# EAGLE board GrblMainboard - v3.1 (EAGLE 6.3)
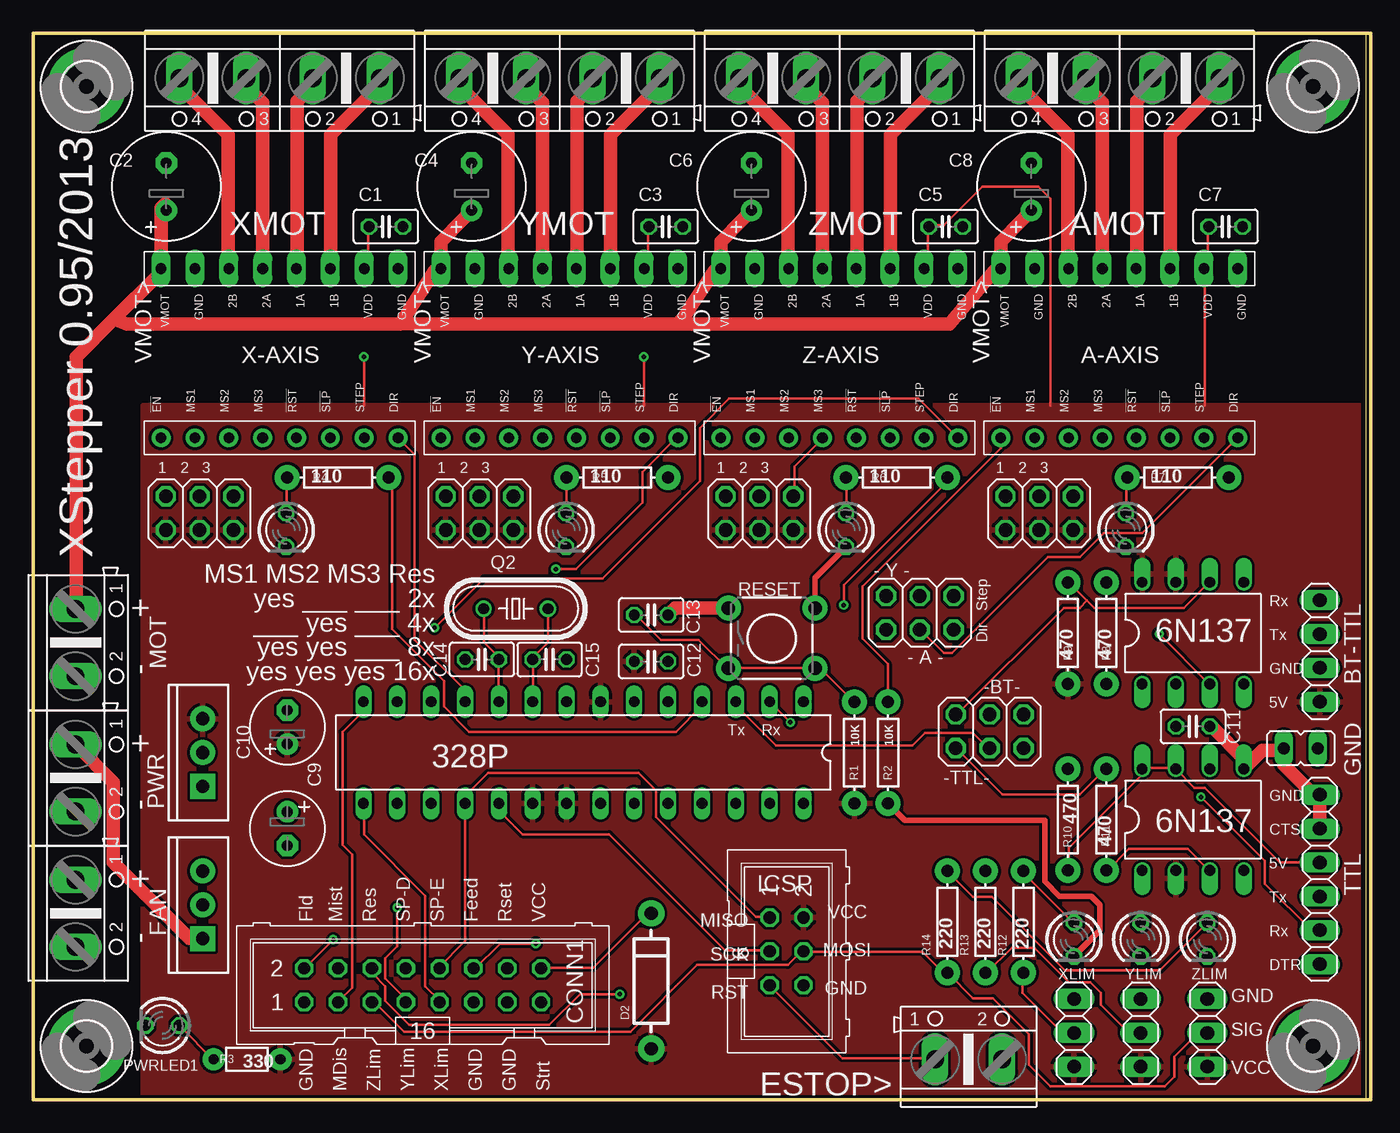
[diagram p0: board, top side]
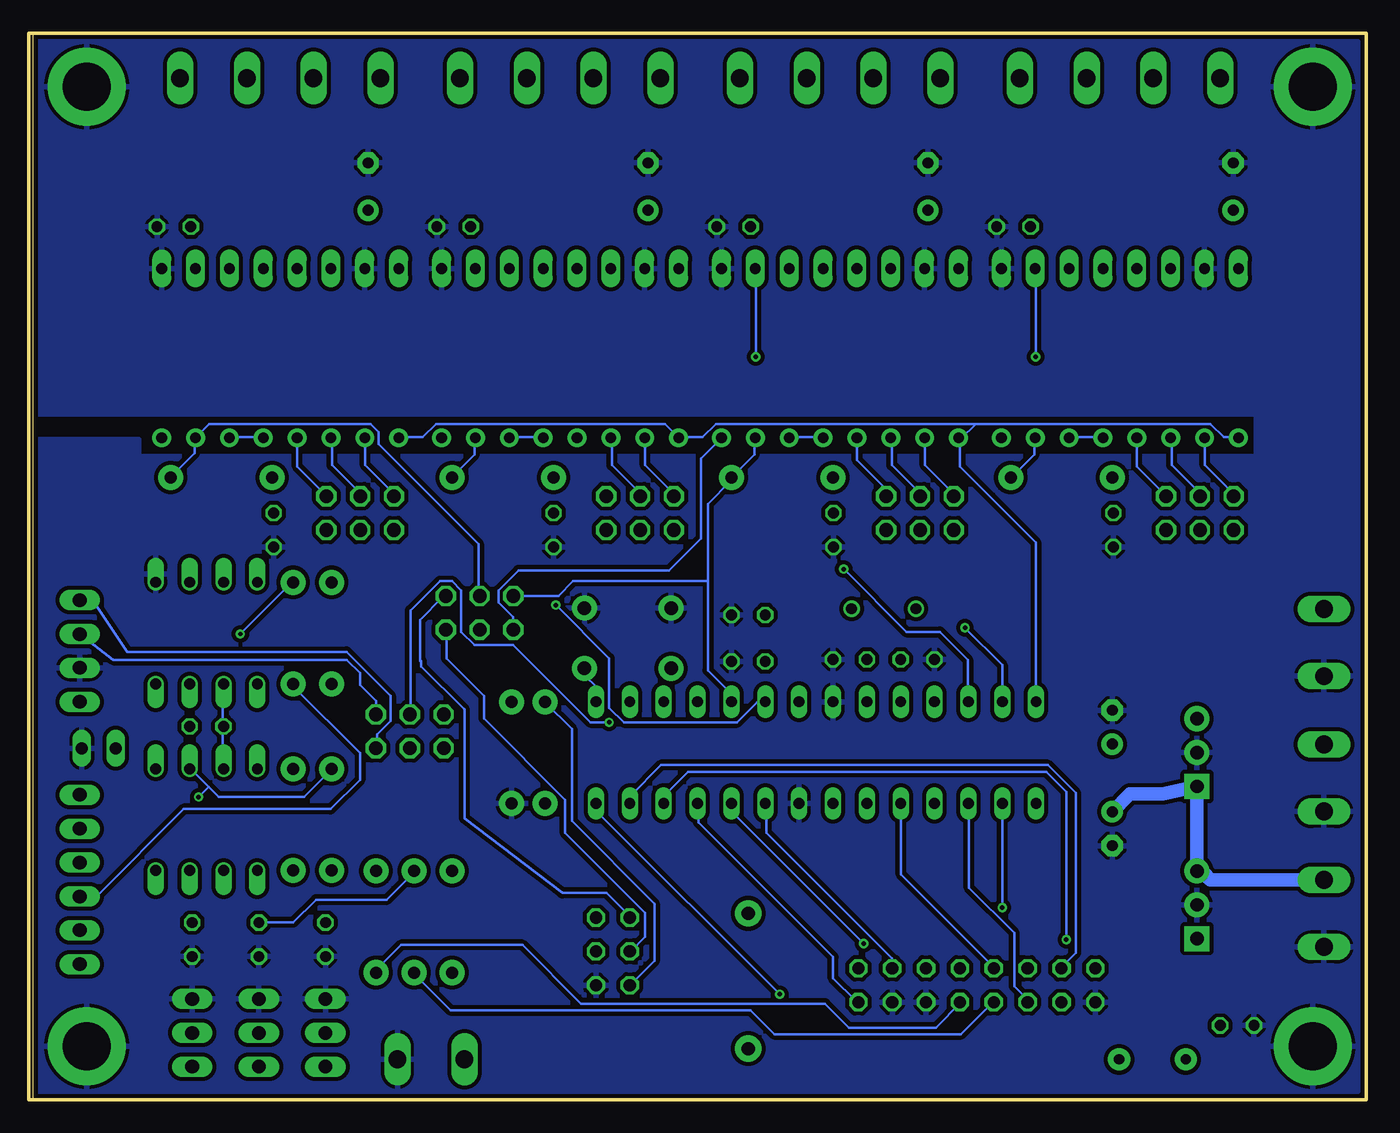
[diagram p1: board, bottom side, seen from below]

Size 100 x 80 mm. Coordinates in mm from the lower left corner, seen from the top.
Outline: 0,0 100,0 100,80 0,80 0,0
Copper layers (1*16): Top 0.0356mm / dielectric 1.5011mm / Bottom 0.0356mm
Design rules "LaenPCBOrder": minimum track width 6mil, minimum drill 13mil, track to track 6mil, track to pad 6mil, pad to pad 6mil, via to via 6mil, smd to smd 6mil, copper to edge 15mil, drill to drill 6mil, minimum pad ring 7mil, minimum via ring 7mil, stop-mask expansion 4mil, vias tented up to drill 0mil, thermal gap 10mil
Net classes: 0 default: width 0.203 mm, clearance 0.203 mm; 1 power: width 1.016 mm, clearance 0.305 mm
Milling: 4 lines

## Footprints (pad centres in the part's own frame; a part is rotated, then mirrored left to right if it is on the bottom)
DIL28-3 = drill 0.813 long: 1 -16.51,-3.81; 2 -13.97,-3.81; 3 -11.43,-3.81; 4 -8.89,-3.81; 5 -6.35,-3.81; 6 -3.81,-3.81; 7 -1.27,-3.81; 8 1.27,-3.81; 9 3.81,-3.81; 10 6.35,-3.81; 11 8.89,-3.81; 12 11.43,-3.81; 13 13.97,-3.81; 14 16.51,-3.81; 15 16.51,3.81; 16 13.97,3.81; 17 11.43,3.81; 18 8.89,3.81; 19 6.35,3.81; 20 3.81,3.81; 21 1.27,3.81; 22 -1.27,3.81; 23 -3.81,3.81; 24 -6.35,3.81; 25 -8.89,3.81; 26 -11.43,3.81; 27 -13.97,3.81; 28 -16.51,3.81
TO220-IGO = drill 1 pad 1.88: GND 0,0; OUT 2.54,0 | drill 1 pad 1.88 square: IN -2.54,0
2X03 = drill 1.016 octagon: 1 -2.54,-1.27; 2 -2.54,1.27; 3 0,-1.27; 4 0,1.27; 5 2.54,-1.27; 6 2.54,1.27
LED3MM = drill 0.813 octagon: A -1.27,0; K 1.27,0
AK500/4 = drill 1.321 long: 1 -7.518,0; 2 -2.489,0; 3 2.489,0; 4 7.518,0
1X04 = drill 1.016 long: 1 -3.81,0; 2 -1.27,0; 3 1.27,0; 4 3.81,0
C025-025X050 = drill 0.813 octagon: 1 -1.27,0; 2 1.27,0
E3,5-8 = drill 0.813 pad 1.6: + -1.778,0 | drill 0.813 pad 1.6 octagon: - 1.778,0
E2,5-6 = drill 0.813 pad 1.6: + -1.27,0 | drill 0.813 pad 1.6 octagon: - 1.27,0
ML16 = drill 0.914 octagon: 1 -8.89,-1.27; 2 -8.89,1.27; 3 -6.35,-1.27; 4 -6.35,1.27; 5 -3.81,-1.27; 6 -3.81,1.27; 7 -1.27,-1.27; 8 -1.27,1.27; 9 1.27,-1.27; 10 1.27,1.27; 11 3.81,-1.27; 12 3.81,1.27; 13 6.35,-1.27; 14 6.35,1.27; 15 8.89,-1.27; 16 8.89,1.27
DIODE-1N4001 = drill 1 pad 1.981: A -5.08,0; C 5.08,0
AK500/2 = drill 1.321 long: 1 -2.515,0; 2 2.515,0
JP1 = drill 0.914 long: 1 0,-1.27; 2 0,1.27
3,6-PAD = drill 3.6 pad 5.842: B3,6 0,0
ML6 = drill 0.914 octagon: 1 -2.54,-1.27; 2 -2.54,1.27; 3 0,-1.27; 4 0,1.27; 5 2.54,-1.27; 6 2.54,1.27
DIL08 = drill 0.813 offset: 1 -3.81,-3.81; 2 -1.27,-3.81; 3 1.27,-3.81; 4 3.81,-3.81; 5 3.81,3.81; 6 1.27,3.81; 7 -1.27,3.81; 8 -3.81,3.81
HC49/S = drill 0.813: 1 -2.413,0; 2 2.413,0
AXIAL-0.3 = drill 0.9 pad 1.88: P$1 -3.81,0; P$2 3.81,0
1/6W-RES = drill 0.762 pad 1.676: 1 -2.5,0; 2 2.5,0
TACTILE-PTH = drill 1.016 pad 1.88: 1 -3.251,2.261; 2 3.251,2.261; 3 -3.251,-2.261; 4 3.251,-2.261
POLOLU-ALLEGRO-PTH = drill 0.8 pad 1.422 long: 1A 6.35,-1.27; 1B 6.35,-3.81; 2A 6.35,1.27; 2B 6.35,3.81; GNDMOT 6.35,6.35; GNDVDD 6.35,-8.89; VDD 6.35,-6.35; VMOT 6.35,8.89 | drill 0.8 pad 1.422: !EN -6.35,8.89; !RST -6.35,-1.27; !SLP -6.35,-3.81; DIR -6.35,-8.89; MS1 -6.35,6.35; MS2 -6.35,3.81; MS3 -6.35,1.27; STEP -6.35,-6.35
1X06 = drill 1.016 long: 1 -6.35,0; 2 -3.81,0; 3 -1.27,0; 4 1.27,0; 5 3.81,0; 6 6.35,0
1X03 = drill 1.016 long: 1 -2.54,0; 2 0,0; 3 2.54,0

## Placement (x,y rotation side)
328P  CONTROLLER  [DIL28-3]  41.27,26.04 180 top
7812  [TO220-IGO]  12.7,14.61 90 top
A-AXIS  [2X03]  75.48,44 0 top
ALED  [LED3MM]  81.98,42.73 270 top
AMOT  [AK500/4]  81.48,76.64 180 top
BT-TTL  [1X04]  96.52,33.66 90 top
C1  0.1uF  [C025-025X050]  26.45,65.5 180 top
C2  100uF  [E3,5-8]  9.98,68.5 90 top
C3  0.1uF  [C025-025X050]  47.45,65.5 180 top
C4  100uF  [E3,5-8]  32.88,68.5 90 top
C5  0.1uF  [C025-025X050]  68.45,65.5 180 top
C6  100uF  [E3,5-8]  53.88,68.5 90 top
C7  0.1uF  [C025-025X050]  89.45,65.5 180 top
C8  100uF  [E3,5-8]  74.88,68.5 90 top
C9  200uF  [E2,5-6]  19.05,20.32 270 top
C10  100uF  [E2,5-6]  19.05,27.94 90 top
C11  0.1uF  [C025-025X050]  87,28 0 top
C12  0.1uF  [C025-025X050]  46.35,32.86 180 top
C13  0.1uF  [C025-025X050]  46.35,36.35 180 top
C14  18pF  [C025-025X050]  33.66,33.02 180 top
C15  18pF  [C025-025X050]  38.73,33.02 0 top
COMMSEL  [2X03]  71.75,27.62 0 top
CONN1  [ML16]  29.21,8.57 0 top
D2  [DIODE-1N4001]  46.35,8.89 90 top
ESTOP>  [AK500/2]  70.17,3.02 0 top
FAN  [AK500/2]  3.17,13.97 270 top
GND  [JP1]  95.09,26.35 270 top
H5  MOUNT-PAD-ROUND3.6  [3,6-PAD]  96,76 0 top
H6  MOUNT-PAD-ROUND3.6  [3,6-PAD]  4,4 0 top
H7  MOUNT-PAD-ROUND3.6  [3,6-PAD]  4,76 0 top
H8  MOUNT-PAD-ROUND3.6  [3,6-PAD]  96,4 0 top
IC1  [TO220-IGO]  12.7,26.04 90 top
ICSP  [ML6]  56.52,11.11 270 top
JP1  [2X03]  66.52,36.51 180 top
MOT  [AK500/2]  3.17,34.29 270 top
OK1  6N137  [DIL08]  87,21 0 top
OK2  6N137  [DIL08]  87,35 0 top
PWR  [AK500/2]  3.17,24.13 270 top
PWRLED1  [LED3MM]  9.68,5.56 180 top
Q2  16 MHZ  [HC49/S]  36.2,36.83 180 top
R1  10K  [AXIAL-0.3]  61.59,26.04 270 top
R2  10K  [AXIAL-0.3]  64.14,26.04 270 top
R3  330  [1/6W-RES]  16.03,3.02 180 top
R4  110  [AXIAL-0.3]  22.86,46.67 0 top
R5  110  [AXIAL-0.3]  43.82,46.67 0 top
R6  110  [AXIAL-0.3]  64.77,46.67 0 top
R7  110  [AXIAL-0.3]  85.88,46.67 0 top
R8  470  [AXIAL-0.3]  80.5,35 90 top
R9  470  [AXIAL-0.3]  77.62,35 90 top
R10  470  [AXIAL-0.3]  77.62,21 270 top
R11  470  [AXIAL-0.3]  80.5,21 90 top
R12  220  [AXIAL-0.3]  74.3,13.34 90 top
R13  220  [AXIAL-0.3]  71.44,13.34 90 top
R14  220  [AXIAL-0.3]  68.58,13.34 90 top
RESET  RESET  [TACTILE-PTH]  55.4,34.61 0 top
STEPPERDRIVER  POLOLU-A4988  [POLOLU-ALLEGRO-PTH]  18.48,56 90 top
STEPPERDRIVER1  POLOLU-A4988  [POLOLU-ALLEGRO-PTH]  39.48,56 90 top
STEPPERDRIVER2  POLOLU-A4988  [POLOLU-ALLEGRO-PTH]  60.48,56 90 top
STEPPERDRIVER3  POLOLU-A4988  [POLOLU-ALLEGRO-PTH]  81.48,56 90 top
TTL  GND  [1X06]  96.52,16.51 270 top
X-AXIS  [2X03]  12.48,44 0 top
XLED  [LED3MM]  18.98,42.73 270 top
XLIM  [1X03]  78.08,5 90 top
XMOT  [AK500/4]  18.48,76.64 180 top
XSTLED  [LED3MM]  78.08,12 270 top
Y-AXIS  [2X03]  33.48,44 0 top
YLED  [LED3MM]  39.98,42.73 270 top
YLIM  [1X03]  83.08,5 90 top
YMOT  [AK500/4]  39.48,76.64 180 top
YSTLED  [LED3MM]  83.08,12 270 top
Z-AXIS  [2X03]  54.48,44 0 top
ZLED  [LED3MM]  60.98,42.73 270 top
ZLIM  [1X03]  88.08,5 90 top
ZMOT  [AK500/4]  60.48,76.64 180 top
ZSTLED  [LED3MM]  88.08,12 270 top

## Library data of the parts
328P = Bibsatmel; OC_FARNELL: unknown; OC_NEWARK: unknown
7812 IC1 = SparkFun-PowerIC
A-AXIS BT-TTL COMMSEL JP1 TTL X-AXIS XLIM Y-AXIS YLIM Z-AXIS ZLIM = pinhead
ALED PWRLED1 XLED XSTLED YLED YSTLED ZLED ZSTLED = led
AMOT ESTOP> FAN MOT PWR XMOT YMOT ZMOT = con-ptr500; OC_FARNELL: unknown; OC_NEWARK: unknown
C1-C15 = resistor
CONN1 ICSP = con-ml; OC_FARNELL: unknown; OC_NEWARK: unknown
D2 = SparkFun-DiscreteSemi
GND = jumper
H5-H8 = holes
OK1 OK2 = optocoupler; MPN: 6N137; OC_FARNELL: 1328376; OC_NEWARK: 52M1895
Q2 = crystal; OC_FARNELL: 1667008; OC_NEWARK: unknown
R1-R14 = SparkFun-Resistors
RESET = SparkFun
STEPPERDRIVER STEPPERDRIVER1-STEPPERDRIVER3 = pololu-allegro

## Nets
5V: 328P.7 328P.20 328P.21 A-AXIS.1 A-AXIS.3 A-AXIS.5 BT-TTL.1 C1.2 C3.2 C5.2 C7.2 C10.+ C12.2 D2.A IC1.OUT ICSP.2 OK1.2 OK2.7 OK2.8 R1.P$2 R3.1 R9.P$1 STEPPERDRIVER1.VDD STEPPERDRIVER2.VDD STEPPERDRIVER3.VDD STEPPERDRIVER.VDD X-AXIS.1 X-AXIS.3 X-AXIS.5 XLIM.1 Y-AXIS.1 Y-AXIS.3 Y-AXIS.5 YLIM.1 Z-AXIS.1 Z-AXIS.3 Z-AXIS.5 ZLIM.1
12V [power]: 7812.OUT C9.+ FAN.1 IC1.IN
+24V [power]: 7812.IN PWR.1
A-DIR: JP1.4 STEPPERDRIVER3.DIR
A-STEP: JP1.3 R7.P$2 STEPPERDRIVER3.STEP
BTRXD: BT-TTL.3 COMMSEL.6
BTTXD: BT-TTL.4 COMMSEL.5
COOLANT-FLOOD: 328P.26 CONN1.2
COOLANT-MIST: 328P.27 CONN1.4
CYCLE-START: 328P.25 CONN1.15
FEED-HOLD: 328P.24 CONN1.12
G-RESET: 328P.23 CONN1.14
GND [power]: 328P.8 328P.22 7812.GND ALED.K BT-TTL.2 C1.1 C2.- C3.1 C4.- C5.1 C6.- C7.1 C8.- C9.- C10.- C12.1 C13.1 C14.2 C15.2 CONN1.1 CONN1.11 CONN1.13 ESTOP>.2 FAN.2 GND.2 H5.B3,6 H6.B3,6 H7.B3,6 H8.B3,6 IC1.GND ICSP.6 MOT.2 OK2.5 PWR.2 PWRLED1.K R2.P$2 RESET.1 RESET.2 STEPPERDRIVER1.GNDMOT STEPPERDRIVER1.GNDVDD STEPPERDRIVER2.GNDMOT STEPPERDRIVER2.GNDVDD STEPPERDRIVER3.GNDMOT STEPPERDRIVER3.GNDVDD STEPPERDRIVER.GNDMOT STEPPERDRIVER.GNDVDD XLED.K XLIM.3 XSTLED.K YLED.K YLIM.3 YSTLED.K ZLED.K ZLIM.3 ZSTLED.K
MOTOR_DISABLE: 328P.14 CONN1.3 R2.P$1 STEPPERDRIVER1.!EN STEPPERDRIVER2.!EN STEPPERDRIVER3.!EN STEPPERDRIVER.!EN
N$1 [power]: STEPPERDRIVER.1B XMOT.1
N$2 [power]: STEPPERDRIVER.1A XMOT.2
N$3 [power]: STEPPERDRIVER.2A XMOT.3
N$4 [power]: STEPPERDRIVER.2B XMOT.4
N$5: STEPPERDRIVER.!RST STEPPERDRIVER.!SLP
N$6: STEPPERDRIVER.MS1 X-AXIS.2
N$7: STEPPERDRIVER.MS2 X-AXIS.4
N$8: STEPPERDRIVER.MS3 X-AXIS.6
N$9 [power]: STEPPERDRIVER1.1B YMOT.1
N$10 [power]: STEPPERDRIVER1.1A YMOT.2
N$11 [power]: STEPPERDRIVER1.2A YMOT.3
N$12 [power]: STEPPERDRIVER1.2B YMOT.4
N$13: STEPPERDRIVER1.!RST STEPPERDRIVER1.!SLP
N$14: STEPPERDRIVER1.MS1 Y-AXIS.2
N$15: STEPPERDRIVER1.MS2 Y-AXIS.4
N$16: STEPPERDRIVER1.MS3 Y-AXIS.6
N$17 [power]: STEPPERDRIVER2.2B ZMOT.4
N$18 [power]: STEPPERDRIVER2.2A ZMOT.3
N$19 [power]: STEPPERDRIVER2.1A ZMOT.2
N$20 [power]: STEPPERDRIVER2.1B ZMOT.1
N$21: STEPPERDRIVER2.!RST STEPPERDRIVER2.!SLP
N$22: STEPPERDRIVER2.MS1 Z-AXIS.2
N$23: STEPPERDRIVER2.MS2 Z-AXIS.4
N$24: STEPPERDRIVER2.MS3 Z-AXIS.6
N$25 [power]: AMOT.1 STEPPERDRIVER3.1B
N$26 [power]: AMOT.2 STEPPERDRIVER3.1A
N$27 [power]: AMOT.3 STEPPERDRIVER3.2A
N$28 [power]: AMOT.4 STEPPERDRIVER3.2B
N$29: STEPPERDRIVER3.!RST STEPPERDRIVER3.!SLP
N$30: A-AXIS.2 STEPPERDRIVER3.MS1
N$31: A-AXIS.4 STEPPERDRIVER3.MS2
N$32: A-AXIS.6 STEPPERDRIVER3.MS3
N$33: 328P.9 C15.1 Q2.1
N$34: 328P.10 C14.1 Q2.2
N$35: OK2.3 R8.P$2
N$36: OK1.3 R11.P$1
N$37: R12.P$2 XSTLED.A
N$38: R4.P$1 XLED.A
N$39: R5.P$1 YLED.A
N$40: R6.P$1 ZLED.A
N$41: ALED.A R7.P$1
N$42: R13.P$2 YSTLED.A
N$43: PWRLED1.A R3.2
N$44: R14.P$2 ZSTLED.A
N$45: CONN1.16 D2.C
PWRMOT [power]: C2.+ C4.+ C6.+ C8.+ MOT.1 STEPPERDRIVER1.VMOT STEPPERDRIVER2.VMOT STEPPERDRIVER3.VMOT STEPPERDRIVER.VMOT
RESERVED: 328P.28 CONN1.6
RESET: 328P.1 C13.2 ESTOP>.1 ICSP.5 R1.P$1 RESET.3 RESET.4
RXD: 328P.2 COMMSEL.4
RXDUSB: COMMSEL.2 OK2.6 R9.P$2
SPINDLE-DIR: 328P.19 CONN1.8 ICSP.3 JP1.2
SPINDLE-ENABLE: 328P.18 CONN1.10 ICSP.1 JP1.1
TXD: 328P.3 COMMSEL.3
TXDUSB: COMMSEL.1 R11.P$2
USB_5V: C11.1 OK1.7 OK1.8 OK2.2 R10.P$2 TTL.3
USB_GND [power]: C11.2 GND.1 OK1.5 TTL.1 TTL.2
USB_RXD: OK1.6 R10.P$1 TTL.5
USB_TXD: R8.P$1 TTL.4
X-DIR: 328P.11 STEPPERDRIVER.DIR
X-STEP: 328P.4 R4.P$2 STEPPERDRIVER.STEP
X-STOP: 328P.15 CONN1.9 R12.P$1 XLIM.2
Y-DIR: 328P.12 JP1.6 STEPPERDRIVER1.DIR
Y-STEP: 328P.5 JP1.5 R5.P$2 STEPPERDRIVER1.STEP
Y-STOP: 328P.16 CONN1.7 R13.P$1 YLIM.2
Z-DIR: 328P.13 STEPPERDRIVER2.DIR
Z-STEP: 328P.6 R6.P$2 STEPPERDRIVER2.STEP
Z-STOP: 328P.17 CONN1.5 ICSP.4 R14.P$1 ZLIM.2

## Tracks (layer width: path | path; a pad name or v marks a point on that pad's centre or on a via)
5V  (via drill 0.33)
  Top 0.203: C7.2 88.1,65.5 88.1,62.6 87.9,62.4 STEPPERDRIVER3.VDD 87.9,62.3 87.9,52.07 | STEPPERDRIVER2.VDD 66.9,62.4 67.1,62.6 67.1,65.5 C5.2 67.2,65.6 68.3,65.6 71.2,68.5 75.41,68.5 76.3,67.61 76.3,52.07 | C3.2 46.1,65.5 46.1,62.6 45.9,62.4 STEPPERDRIVER1.VDD | C1.2 25.1,65.5 25.1,62.6 24.9,62.4 STEPPERDRIVER.VDD | 24.8,52.07 v24.8,55.73 | 45.8,52.07 v45.8,55.73 | 77.6,31.2 R9.P$1
  Bottom 0.203: v24.8,55.73 24.8,62.3 STEPPERDRIVER.VDD | v45.8,55.73 45.8,62.3 STEPPERDRIVER1.VDD
  pour Top: 8.26,52.07 100.33,52.07 100.33,0 8.26,0
12V
  Bottom 1.016: C9.+ 17.73,22.94 15.24,22.94 IC1.IN 7812.OUT 12.2,17 11.7,16.5 3.2,16.5 FAN.1
+24V
  Top 1.016: 7812.IN 12.7,12.1 11.7,12.1 6,17.8 6,23.8 3.2,26.6 PWR.1
A-DIR
  Top 0.203: STEPPERDRIVER3.DIR 90.3,49.6 83.2,42.5 80.3,42.5 78.5,40.7 76.1,40.7 68.9,33.5 68.3,33.5 66.6,35.2 JP1.4
A-STEP
  Bottom 0.203: R7.P$2 89.7,46.7 87.9,48.5 87.9,49.6 STEPPERDRIVER3.STEP 87.8,49.7 86.8,50.7 74.7,50.7 74.1,50.1 74.1,49.2 66.6,41.7 66.6,37.8 JP1.3
BTRXD
  Bottom 0.203: COMMSEL.6 74.3,29.9 75.5,31.1 75.5,32 76.5,32.99 94,33 BT-TTL.3
BTTXD
  Bottom 0.203: COMMSEL.5 74.2,26.4 74.2,27.4 73.2,28.4 73.2,30.3 76.5,33.59 92.97,33.59 95.5,37.4 96.5,37.4 BT-TTL.4
COOLANT-FLOOD  (via drill 0.33)
  Top 0.203: v22.5,12 20.4,9.9 CONN1.2
  Bottom 0.203: v22.5,12 22.5,23.1 24,24.6 50.9,24.6 52.7,22.8 52.7,22.3 328P.26
COOLANT-MIST
  Bottom 0.203: 328P.27 55.2,22.3 55.2,22.8 52.9,25.1 23.9,25.1 21.8,23 21.8,11 22.9,9.9 CONN1.4
CYCLE-START
  Bottom 0.203: 328P.25 50.1,22.2 50.1,20.8 40,10.7 40,9.1 38.3,7.4 38.1,7.4 CONN1.15
FEED-HOLD  (via drill 0.33)
  Top 0.203: v37.7,11.7 35,11.7 33.1,9.8 CONN1.12
  Bottom 0.203: v37.7,11.7 47.6,21.6 47.6,22.2 328P.24
G-RESET
  Bottom 0.203: 328P.23 45,22.2 45,20 35.6,10.6 35.6,9.9 CONN1.14
GND
  Top 0.406: RESET.2 58.66,39.14 ZLED.K | R2.P$2 65.41,20.95 75.88,20.95 75.88,16.35 76.99,15.24 79.38,15.24 80.01,14.61 80.01,12.7 XSTLED.K
  Top 1.016: RESET.1 48.14,36.87 C13.1
  Bottom 1.016: ZLED.K | ZLED.K 61,41.5 ZLED.K
  pour Bottom: 0.64,0.64 0.64,79.38 99.69,79.38 99.69,51.44 8.26,51.44 8.26,48.26 92.08,48.26 92.08,49.53 99.69,49.53 99.69,0.64
MOTOR_DISABLE
  Top 0.203: CONN1.3 22.9,7.4 23.9,8.4 23.9,18.39 23.2,19.09 23.2,27.6 24.7,29.1 24.7,29.8 328P.14 | R2.P$1 64.1,29.9 64.1,32.7 62.2,34.6 62.2,38.5 72.6,48.9 72.6,49.6 STEPPERDRIVER3.!EN
  Bottom 0.203: 328P.14 24.8,29.9 24.8,41.8 30.5,47.5 30.5,49.6 STEPPERDRIVER1.!EN 30.4,49.6 29.3,50.7 | 29.3,50.7 11.7,50.7 10.7,49.7 9.6,49.7 STEPPERDRIVER.!EN | 29.3,50.7 48.8,50.7 49.8,49.7 51.5,49.7 STEPPERDRIVER2.!EN 51.6,49.7 52.6,50.7 69.8,50.7 70.8,49.7 72.5,49.7 STEPPERDRIVER3.!EN
N$1
  Top 1.016: STEPPERDRIVER.1B 22.3,62.4 22.3,72.4 25.9,76 XMOT.1
N$2
  Top 1.016: STEPPERDRIVER.1A 19.8,62.4 19.8,74.9 20.9,76 XMOT.2
N$3
  Top 1.016: STEPPERDRIVER.2A 17.2,62.4 17.2,74.8 16,76 XMOT.3
N$4
  Top 1.016: STEPPERDRIVER.2B 14.6,62.4 14.6,72.4 11,76 XMOT.4
N$5
  Bottom 0.203: STEPPERDRIVER.!RST 19.8,49.7 22.2,49.7 STEPPERDRIVER.!SLP
N$6
  Bottom 0.203: STEPPERDRIVER.MS1 12.1,49.6 12.1,47.6 10,45.5 10,45.3 X-AXIS.2
N$7
  Bottom 0.203: STEPPERDRIVER.MS2 14.6,49.6 14.6,47.6 12.5,45.5 12.5,45.3 X-AXIS.4
N$8
  Bottom 0.203: STEPPERDRIVER.MS3 17.2,49.6 17.2,47.5 15,45.3 X-AXIS.6
N$9
  Top 1.016: STEPPERDRIVER1.1B 43.3,62.4 43.3,72.4 46.9,76 YMOT.1
N$10
  Top 1.016: STEPPERDRIVER1.1A 40.8,62.4 40.8,74.9 41.9,76 YMOT.2
N$11
  Top 1.016: STEPPERDRIVER1.2A 38.2,62.4 38.2,74.8 37,76 YMOT.3
N$12
  Top 1.016: STEPPERDRIVER1.2B 35.6,62.4 35.6,72.4 32,76 YMOT.4
N$13
  Bottom 0.203: STEPPERDRIVER1.!RST 40.8,49.7 43.2,49.7 STEPPERDRIVER1.!SLP
N$14
  Bottom 0.203: STEPPERDRIVER1.MS1 33.1,49.6 33.1,47.6 31,45.5 31,45.3 Y-AXIS.2
N$15
  Bottom 0.203: STEPPERDRIVER1.MS2 35.6,49.6 35.6,47.6 33.5,45.5 33.5,45.3 Y-AXIS.4
N$16
  Bottom 0.203: STEPPERDRIVER1.MS3 38.2,49.6 38.2,48 36.1,45.9 36.1,45.3 Y-AXIS.6
N$17
  Top 1.016: STEPPERDRIVER2.2B 56.6,62.4 56.6,72.4 53,76 ZMOT.4
N$18
  Top 1.016: STEPPERDRIVER2.2A 59.2,62.4 59.2,74.8 58,76 ZMOT.3
N$19
  Top 1.016: STEPPERDRIVER2.1A 61.8,62.4 61.8,74.9 62.9,76 ZMOT.2
N$20
  Top 1.016: STEPPERDRIVER2.1B 64.3,62.4 64.3,72.4 67.9,76 ZMOT.1
N$21
  Bottom 0.203: STEPPERDRIVER2.!RST 61.8,49.7 64.2,49.7 STEPPERDRIVER2.!SLP
N$22
  Bottom 0.203: STEPPERDRIVER2.MS1 54.1,49.6 54.1,47.6 52,45.5 52,45.3 Z-AXIS.2
N$23
  Bottom 0.203: STEPPERDRIVER2.MS2 56.6,49.6 56.6,47.6 54.5,45.5 54.5,45.3 Z-AXIS.4
N$24
  Top 0.203: STEPPERDRIVER2.MS3 59.2,49.6 57.1,47.5 57.1,45.3 Z-AXIS.6
N$25
  Top 1.016: STEPPERDRIVER3.1B 85.3,62.4 85.3,72.4 88.9,76 AMOT.1
N$26
  Top 1.016: STEPPERDRIVER3.1A 82.8,62.4 82.8,74.9 83.9,76 AMOT.2
N$27
  Top 1.016: STEPPERDRIVER3.2A 80.2,62.4 80.2,74.8 79,76 AMOT.3
N$28
  Top 1.016: STEPPERDRIVER3.2B 77.6,62.4 77.6,72.4 74,76 AMOT.4
N$29
  Bottom 0.203: STEPPERDRIVER3.!RST 82.8,49.7 85.2,49.7 STEPPERDRIVER3.!SLP
N$30
  Bottom 0.203: STEPPERDRIVER3.MS1 75.1,49.6 75.1,47.6 73,45.5 73,45.3 A-AXIS.2
N$31
  Bottom 0.203: STEPPERDRIVER3.MS2 77.6,49.6 77.6,47.6 75.5,45.5 75.5,45.3 A-AXIS.4
N$32
  Bottom 0.203: STEPPERDRIVER3.MS3 80.2,49.6 80.2,47.5 78,45.3 A-AXIS.6
N$33
  Top 0.203: 328P.9 37.5,29.9 37.5,33 C15.1 37.4,33.1 38.6,34.3 38.6,36.8 Q2.1
N$34
  Top 0.203: 328P.10 34.9,29.9 34.9,33 C14.1 35,33.1 33.8,34.3 33.8,36.8 Q2.2
N$35  (via drill 0.33)
  Top 0.203: v84.47,34.93 88.2,31.2 OK2.3
  Bottom 0.203: v84.47,34.93 80.5,38.9 R8.P$2
N$36
  Top 0.203: OK1.3 88.2,17.2 86.6,18.8 82.2,18.8 80.5,17.1 R11.P$1
N$37
  Top 0.203: XSTLED.A 78,13.3 74.2,17.1 R12.P$2
N$38
  Top 0.203: XLED.A 19,44 19,46.6 R4.P$1
N$39
  Top 0.203: YLED.A 40,44 40,46.6 R5.P$1
N$40
  Top 0.203: ZLED.A 61,44 61,46.6 R6.P$1
N$41
  Top 0.203: ALED.A 82,44 82,46.6 R7.P$1
N$42
  Bottom 0.203: YSTLED.A 83,13.3 80.5,13.3 78.8,15 73.5,15 71.4,17.1 R13.P$2
N$43
  Top 0.203: PWRLED1.A 11,5.5 13.5,3 R3.2
N$44
  Top 0.203: ZSTLED.A 88,13.2 84.5,9.7 77.4,9.7 71.9,15.2 70.5,15.2 68.6,17.1 R14.P$2
N$45
  Top 0.203: CONN1.16 38.1,9.9 42,9.9 46,13.9 46.3,13.9 D2.C
PWRMOT
  Top 1.016: C8.+ 72.9,64.66 72.6,64.36 72.6,62.4 STEPPERDRIVER3.VMOT 72.1,62.2 68.73,58.2 48.43,58.2 48.72,58.55 | C6.+ 51.9,64.66 51.6,64.36 51.6,62.4 STEPPERDRIVER2.VMOT 51.1,62.2 48.72,58.55 | C4.+ 30.9,64.66 30.6,64.36 30.6,62.4 STEPPERDRIVER1.VMOT 30.1,62.2 27.56,58.23 | C2.+ 9.9,67.2 9.6,66.9 9.6,62.4 STEPPERDRIVER.VMOT 9.4,61.9 6.04,58.55 | 6.04,58.55 3.2,55.7 3.2,36.9 MOT.1 | 27.56,58.23 27.52,58.2 7.03,58.2 6.04,58.55 | 48.72,58.55 48.37,58.2 28.7,58.2 27.56,58.23
RESERVED  (via drill 0.33)
  Top 0.203: v44,7.9 41,7.9 38.7,5.6 28.2,5.6 26.4,7.4 26.4,8.5 25.4,9.5 CONN1.6
  Bottom 0.203: v44,7.9 57.7,21.6 57.7,22.2 328P.28
RESET
  Top 0.203: ICSP.5 55.3,8.5 60.7,3.1 67.6,3.1 ESTOP>.1 | R1.P$1 61.5,29.9 59.1,32.3 58.7,32.3 RESET.4 58.6,32.4 52.2,32.4 RESET.3 52.1,32.3 49.9,34.5 47.1,34.5 45.3,36.3 45.1,36.3 C13.2
  Bottom 0.203: 328P.1 57.8,29.9 57.8,31 58.6,31.8 58.6,32.3 RESET.4 | ICSP.5 55.2,8.6 53.4,10.4 53.4,14.7 59.6,20.9 59.6,27.8 61.6,29.8 R1.P$1
RXD  (via drill 0.33)
  Top 0.203: v56.8,28.3 55.3,29.8 328P.2
  Bottom 0.203: v56.8,28.3 58.2,28.3 64,34.1 66.9,34.1 67.9,35.1 67.9,38.2 68.6,38.9 69.5,38.9 71.7,36.7 71.7,28.9 COMMSEL.4
RXDUSB
  Top 0.203: 79.05,37.45 77.7,38.8 R9.P$2 | 79.05,37.45 79.6,36.9 86.3,36.9 88.2,38.8 OK2.6 | 79.05,37.45 78.5,36.9 77.3,36.9 69.3,28.9 COMMSEL.2
SPINDLE-DIR
  Top 0.203: ICSP.3 55.2,11.2 51.9,11.2 43.2,19.9 36.7,19.9 35,21.6 35,22.2 328P.19
  Bottom 0.203: 328P.19 34.9,22.2 34.9,16.9 27.9,9.9 CONN1.8 | JP1.2 69,35.2 69,33.1 66.2,30.3 66.2,28.6 60.1,22.5 60.1,20 54.1,14 54.1,12.2 55.2,11.1 ICSP.3
SPINDLE-ENABLE
  Top 0.203: CONN1.10 30.4,9.9 32.4,11.9 32.4,22.2 328P.18 32.4,22.3 32.4,22.8 34.1,24.5 45.4,24.5 46.7,23.2 46.7,21.2 54.2,13.7 55.2,13.7 ICSP.1
  Bottom 0.203: JP1.1 69.1,37.7 69.3,37.7 71,36 71,32.92 70.9,32.9 70.9,32.5 67.7,29.3 67.65,29.26 67.65,21.11 60.3,15.5 57,15.5 55.2,13.7 ICSP.1
TXD
  Top 0.203: 328P.3 52.8,29.8 52.8,29.5 55.73,26.57 65.96,26.57 66.89,27.5 70.5,27.5 71.7,26.3 COMMSEL.3
TXDUSB
  Top 0.203: COMMSEL.1 69.3,26.3 72.7,22.9 78.5,22.9 80.5,24.9 R11.P$2
USB_5V
  Top 0.203: TTL.3 96.5,17.8 93.5,17.8 87.9,23.4 87.1,23.4 85.7,24.8 OK1.7 85.7,24.9 83.2,24.9 OK1.8 83.6,24.8 77.7,18.9 77.7,17.2 R10.P$2
  Bottom 0.203: OK2.2 85.8,31.1 85.8,28 C11.1 85.8,27.9 85.8,24.9 OK1.7
USB_GND
  Top 1.016: TTL.2 96.5,20.4 96.5,22.8 TTL.1 96,23 95.9,23 93.8,25.1 93.8,25.7 GND.1 93.8,26.3 93.7,26.2 92.2,26.2 OK1.5 90.9,25.5 88.4,28 C11.2
USB_RXD  (via drill 0.33)
  Top 0.203: TTL.5 95.9,12.7 92.4,16.2 92.4,17.9 v87.6,22.7
  Bottom 0.203: 86.85,23.45 86.1,22.7 79.7,22.7 77.6,24.8 R10.P$1 | 86.85,23.45 88.2,24.8 OK1.6 | 86.85,23.45 v87.6,22.7
USB_TXD
  Bottom 0.203: R8.P$1 80.5,31 75.5,26 75.5,24 77.7,21.8 88.7,21.8 95.2,15.3 96.5,15.3 TTL.4
X-DIR
  Top 0.203: 328P.11 32.3,29.9 32.3,30.8 28.6,34.5 28.6,48.4 27.4,49.6 STEPPERDRIVER.DIR
X-STEP
  Top 0.203: 328P.4 50.1,29.8 50.1,29.5 48.2,27.6 32.7,27.6 30.8,29.5 30.8,31.4 26.9,35.3 26.9,46.4 26.7,46.6 R4.P$2
  Bottom 0.203: STEPPERDRIVER.STEP 24.9,49.6 24.9,48.4 26.6,46.7 R4.P$2
X-STOP
  Top 0.203: XLIM.2 77.2,5 74.2,8 74.2,9.5 R12.P$1 | 328P.15 24.8,22.2 24.8,19.9 29.4,15.3 29.4,8.5 30.5,7.4 CONN1.9
  Bottom 0.203: R12.P$1 74.2,9.6 74.2,9.8 72.4,11.6 63.3,11.6 58.9,7.2 40.6,7.2 38.8,5.4 32.3,5.4 30.4,7.3 CONN1.9
Y-DIR  (via drill 0.33)
  Top 0.203: v39.2,39.8 40.7,39.8 45.7,44.8 45.7,47.1 48.3,49.7 STEPPERDRIVER1.DIR
  Bottom 0.203: v39.2,39.8 34.5,35.1 32,35.1 29.9,33 29.9,29.9 328P.12 | JP1.6 64,35.3 64,36.2 65.1,37.3 65.1,38.2 63.6,39.7 52.3,39.7 49.9,42.1 49.9,48.1 48.4,49.6 STEPPERDRIVER1.DIR
Y-STEP
  Bottom 0.203: 49.4,38.9 49.4,44.7 47.7,46.4 47.7,46.6 R5.P$2 47.6,46.7 45.9,48.4 45.9,49.6 STEPPERDRIVER1.STEP | 49.4,38.9 49.4,32.2 47.7,30.5 47.7,29.9 328P.5 | 49.4,38.9 59.5,38.9 60.6,37.8 63.9,37.8 JP1.5
Y-STOP  (via drill 0.33)
  Top 0.203: v27.3,14.4 27.3,11.5 26.4,10.6 26.4,9.1 27.9,7.6 27.9,7.4 CONN1.7 | YLIM.2 82.2,5 80.1,7.1 80.1,8 79.3,8.8 77.7,8.8 75.1,11.4 73.4,11.4 71.5,9.5 R13.P$1
  Bottom 0.203: v27.3,14.4 27.3,22.2 328P.16 | CONN1.7 28,7.3 30.4,4.9 44.4,4.9 46.2,6.7 68.7,6.7 71.5,9.5 R13.P$1
Z-DIR  (via drill 0.33)
  Top 0.203: v30.1,35.4 33.8,39.1 42.7,39.1 50,46.4 50,50.4 52.2,52.6 66.4,52.6 69.3,49.7 STEPPERDRIVER2.DIR
  Bottom 0.203: v30.1,35.4 27.3,32.6 27.3,29.9 328P.13
Z-STEP  (via drill 0.33)
  Top 0.203: v60.8,37.1 60.8,38.6 68.5,46.3 68.5,46.6 R6.P$2
  Bottom 0.203: STEPPERDRIVER2.STEP 66.9,49.6 66.9,48.4 68.6,46.7 R6.P$2 | v60.8,37.1 56.8,33.1 56.8,29.4 55.7,28.3 47.2,28.3 45.7,29.8 45.1,29.8 328P.6
Z-STOP
  Top 0.203: ZLIM.2 87.4,5 85.6,3.2 85.6,1.7 84.88,0.98 76.32,0.98 74.7,2.6 74.7,4.9 72,7.6 70.5,7.6 68.6,9.5 R14.P$1 68.5,9.6 68.2,9.6 66.7,11.1 ICSP.4 57.7,11.2 56.6,10.1 49.8,10.1 44.8,5.1 27.8,5.1 25.6,7.3 CONN1.5
  Bottom 0.203: CONN1.5 25.4,7.5 26.4,8.5 26.4,12.5 29.8,15.9 29.8,22.2 328P.17

## Text on the board
tPlace: - Y - | - A -
tNames: C6 | C8 | VMOT> | VMOT> | VMOT> | VMOT> | 1 2 3 | 1 2 3 | 1 2 3 | 1 2 3 | XStepper 0.95/2013 | MS1 MS2 MS3 Res / yes ___ ___ 2x / ___ yes ___ 4x / yes yes ___ 8x / yes yes yes 16x | Step | Rx | + | 6N137 | Dir | Tx | - | GND | -BT- | 5V | Tx | Rx | + | -TTL- | - | 6N137 | GND | CTS | 5V | + | VCC | Tx | MISO | - | Fld | Mist | Res | SP-D | SP-E | Feed | Rset | VCC | MOSI | Rx | SCK | DTR | RST | GND | GND | SIG | VCC | GND | MDis | ZLim | YLim | XLim | GND | GND | Strt